# Altium PCB Battery_Charger.PcbDoc
Units mil, origin at the board's own origin, x right, y up, seen from the top; angles counter-clockwise.
Board outline 5000 x 2985 mil, 2 copper layers (Top Layer, Bottom Layer); 48 components, 40 nets, 142 pads, 109 vias.
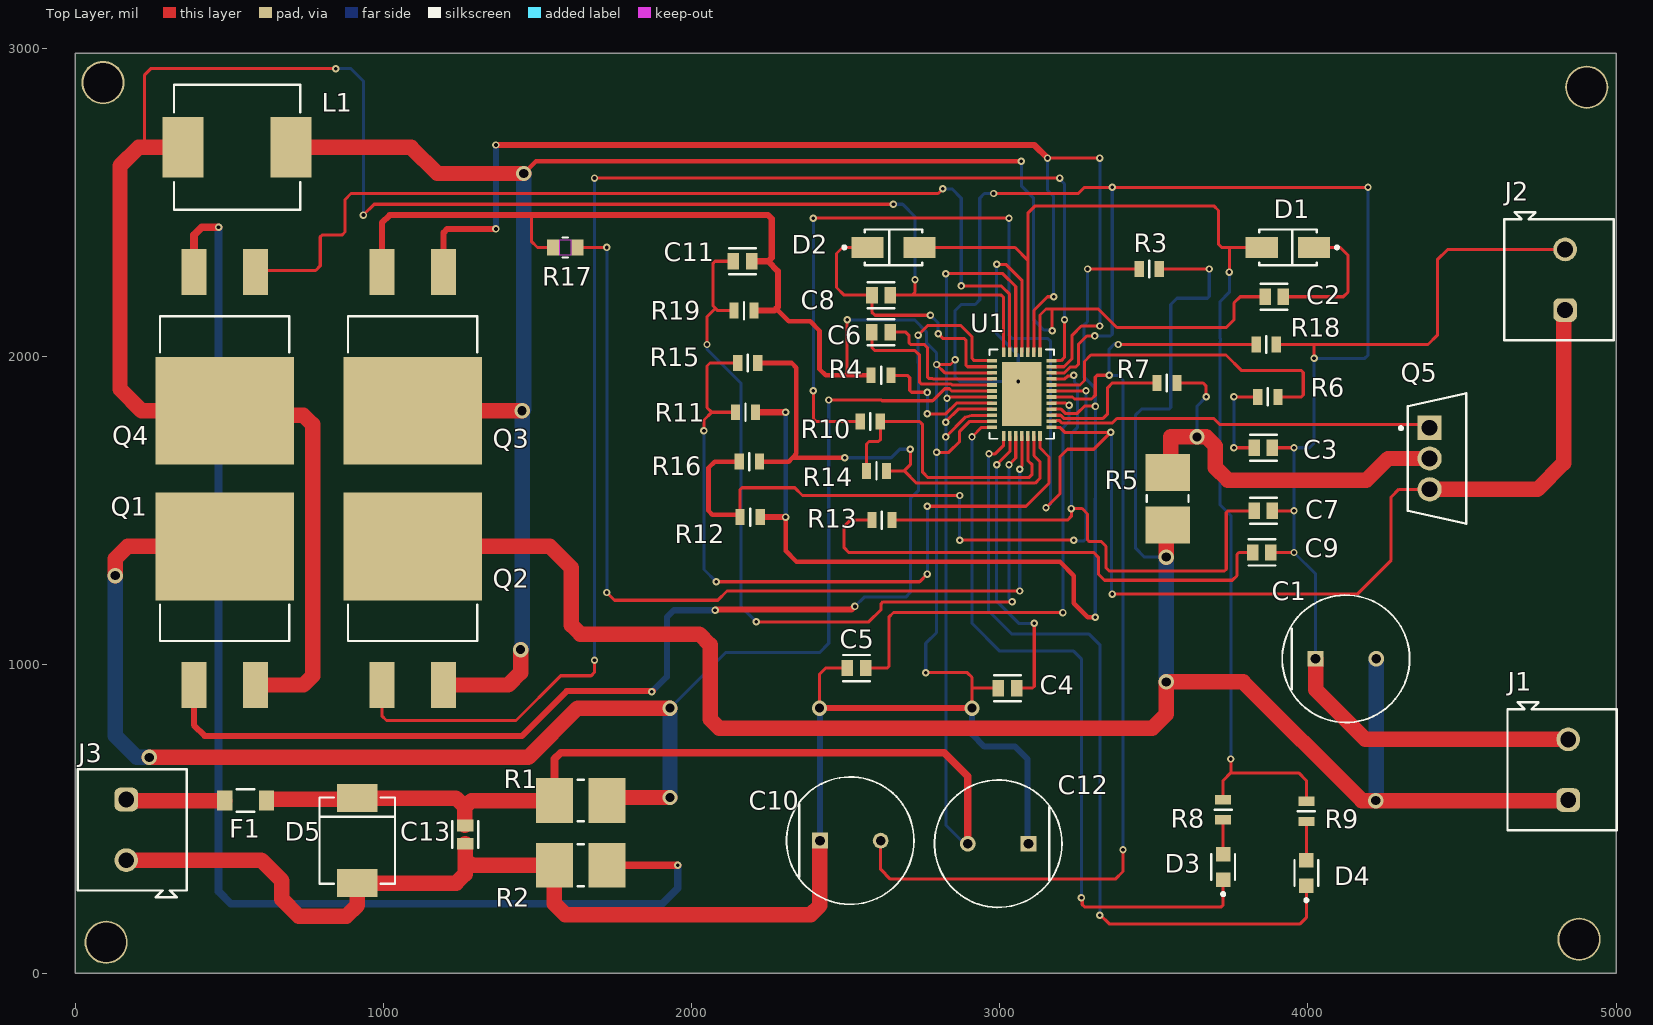
[diagram p0: Top Layer view]
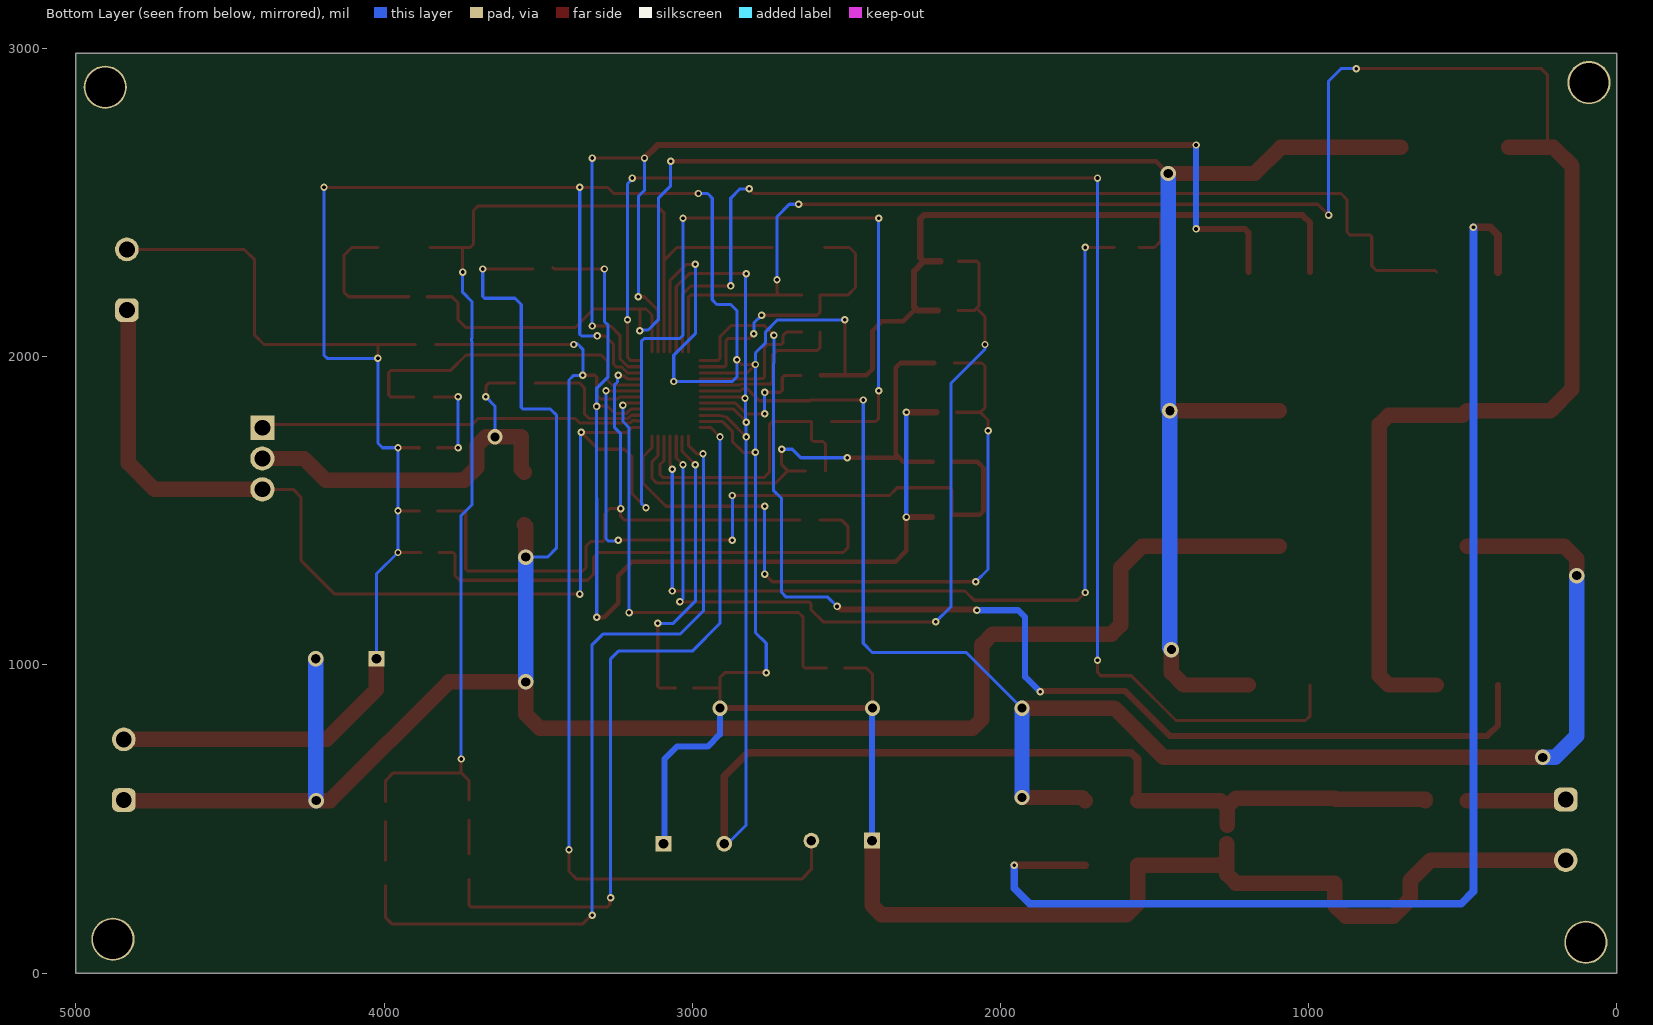
[diagram p1: Bottom Layer view, seen from below]
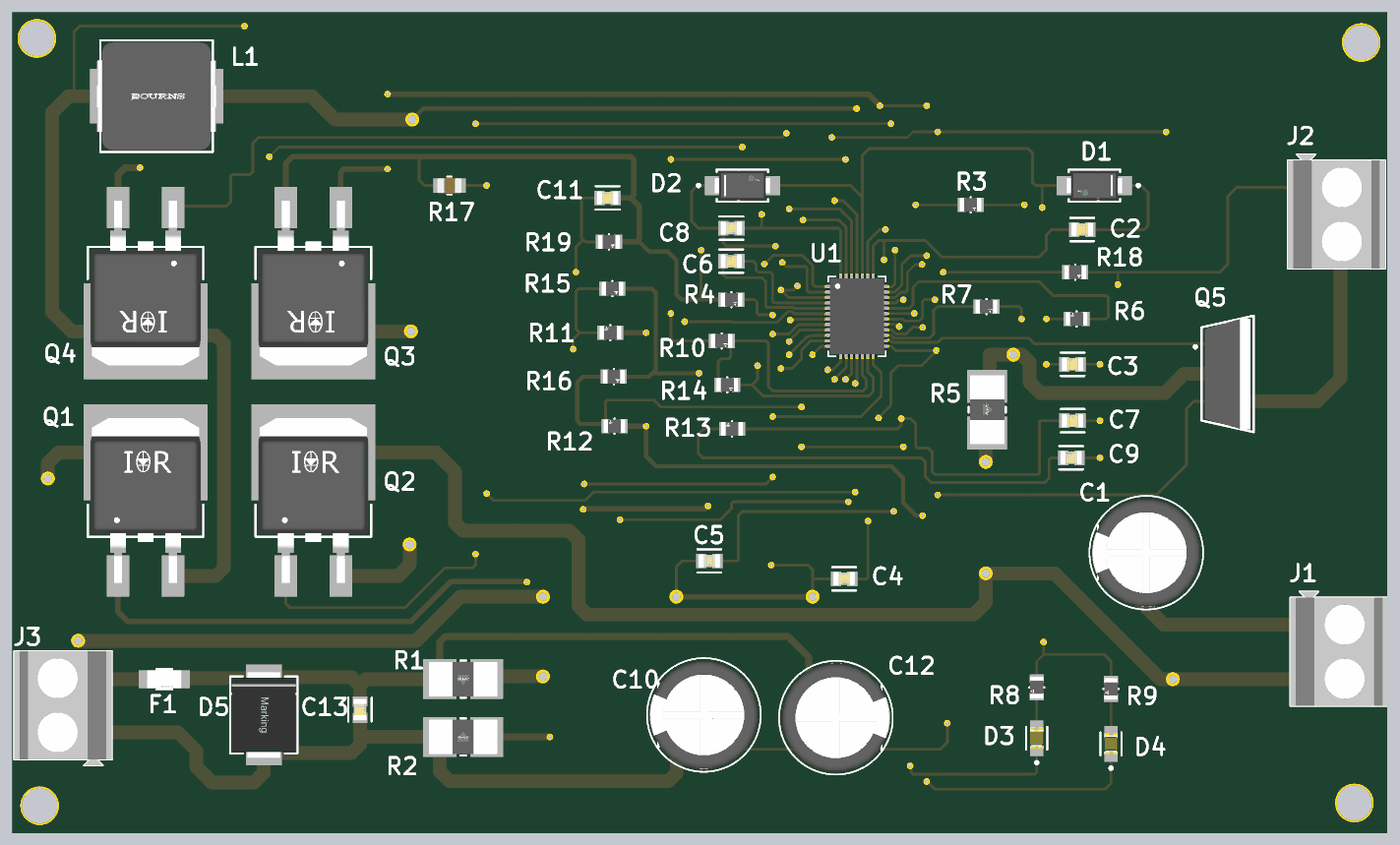
[diagram p2: 3D render of the assembled board from above, using the file's embedded part models]

## Layer stack, top to bottom
Top Solder: solder mask 0.4, Solder Resist, Dk 3.5
Top Layer: signal copper 1.4
Dielectric 1: dielectric 12.6, FR-4, Dk 4.8
Bottom Layer: signal copper 1.4
Bottom Solder: solder mask 0.4, Solder Resist, Dk 3.5

## Board outline
0,0 5000,0 5000,2985 0,2985

## Design rules (kind name [scope] priority, off if disabled: settings)
Clearance [All] p1: gap=10 ignorepadtopadclearanceinfootprint=FALSE except(2: SMDPad-Fill SMDPad-Poly SMDPad-Region; 5: Arc-Arc Arc-Track Arc-SMDPad Track-Track Track-SMDPad SMDPad-SMDPad SMDPad-THPad SMDPad-Via SMDPad-Text SMDPad-Hole; 8: Arc-Fill Arc-Poly Arc-Region Track-Fill Track-Poly Track-Region Fill-Fill Fill-Poly Fill-Region Poly-Poly Poly-Region Region-Region)
HoleSize [All] p1: absolutevalues=TRUE maxlimit=130 minlimit=1 maxpercent=80.000 minpercent=20.000
PolygonConnect [All] p1: connectstyle=Relief reliefconductorwidth=10 reliefentries=4 polygonreliefangle="90 Angle" airgapwidth=10
RoutingVias [All] p1: holewidth=28 width=50 viastyle="Through Hole" minholewidth=10 minwidth=20 maxholewidth=28 maxwidth=50
SolderMaskExpansion [All] p1: expansion=0 istentingtop=FALSE
SupplyNets "Schematic Supply Nets" [InNet('MODE')] p1: voltage=0.000
Width [All] p1: maxlimit=50 minlimit=10 preferedwidth=20 minimp=50.000000 maximp=50.000000 favimp=50.000000
29 further rules are at their usual default settings.

## Classes and differential pairs
component class U_Switching_Bridge: C1 J1 L1 Q1 Q2 Q3 Q4 R1 R2
component class U_LTC4020_Controller: C2 C3 C4 C5 C6 C7 C8 C9 C10 C11 D1 D2 D3 D4 J2 Q5 R3 R4 R5 R6 R7 R8 R9 R10 R11 R12 R13 R14 R15 R16 R17 R18 R19 U1
component class U_Input_Stage: C12 C13 D5 F1 J3

## Components (designator, comment, footprint, x,y, rotation, side; value= is the part's Value field where it differs from the comment)
C1 "1000u" FP-RAD-TH-D_10_0_5-L_25_2-MFG 4123.43,1020 r0 top
C2 "1u" FP-C0805C-DN-MFG 3890.47,2195 r180 top value="0.10 μF"
C3 "10n" FP-C0805C-DN-MFG 3855.47,1705 r0 top value="0.10 μF"
C4 "0.2u" FP-C0805C-DN-MFG 3025,925 r180 top value="0.10 μF"
C5 "100p" FP-C0805C-DN-MFG 2535,990 r180 top value="0.10 μF"
C6 "0.2u" FP-C0805C-DN-MFG 2614.53,2080 r0 top value="0.10 μF"
C7 "68p" FP-C0805C-DN-MFG 3855.47,1500 r0 top value="0.10 μF"
C8 "1u" FP-C0805C-DN-MFG 2615,2200 r180 top value="0.10 μF"
C9 "680p" FP-C0805C-DN-MFG 3850.47,1365 r0 top value="0.10 μF"
C10 "1u" FP-RAD-TH-D_10_0_5-L_16_1-MFG 2515,430 r0 top
C11 "0.1u" FP-C0805C-DN-MFG 2165,2310 r0 top value="0.10 μF"
C12 "10u" FP-RAD-TH-D_10_0_5-L_16_1-MFG 2995,420 r180 top
C13 "0.2u" FP-C0805C-DN-MFG 1265,449.53 r270 top value="0.10 μF"
D1 "SS14" FP-403AE-MFG 3935,2355 r0 top
D2 "SS14" FP-403AE-MFG 2655,2355 r180 top
D3 "APHCM2012CGCK-F01" FP-APHCM2012CGCK-F01-MFG 3725,345 r90 top
D4 "APHCM2012CGCK-F01" FP-APHCM2012CGCK-F01-MFG 3995,325 r90 top
D5 "824540301" WE-TVSP_DO-214AB_Unidirectional 915,430 r270 top
F1 "15A,32VDC" FP-SF-1206HHA-R-MFG 552.91,560 r0 top
J1 "691134710002" 691134710002 4825,660 r90 top
J2 "691134710002" 691134710002 4815,2250 r90 top
J3 "691134710002" 691134710002 185,465 r270 top
L1 "15u" FP-SRP1038WA-MFG 525,2680 r0 top
Q1 "IRF540NSTRLPBF" FP-PG-TO263-3-MFG 485,1210 r0 top
Q2 "IRF540NSTRLPBF" FP-PG-TO263-3-MFG 1095,1210 r0 top
Q3 "IRF540NSTRLPBF" FP-PG-TO263-3-MFG 1095,2000 r180 top
Q4 "IRF540NSTRLPBF" FP-PG-TO263-3-MFG 485,2000 r180 top
Q5 "IRF4905PBF" FP-PG-TO220-3-MFG 4419.02,1670 r0 top
R1 "5 milli ohm" FP-WSLP2512-0R001-0R0049-MFG 1639.96,560 r0 top
R2 "5 milli ohm" FP-WSLP2512-0R001-0R0049-MFG 1639.96,350 r180 top
R3 "100" FP-MCU0805-IPC_C 3485,2285 r0 top
R4 "100k" FP-MCU0805-IPC_C 2615,1940 r0 top
R5 "5 milli ohm" FP-WSLP2512-0R001-0R0049-MFG 3545,1540 r90 top
R6 "56k" FP-MCU0805-IPC_C 3870,1870 r180 top
R7 "100" FP-MCU0805-IPC_C 3542.45,1915 r0 top
R8 "10k" FP-MCU0805-IPC_C 3725,530 r270 top
R9 "10k" FP-MCU0805-IPC_C 3995,525 r270 top
R10 "100k" FP-MCU0805-IPC_C 2580,1790 r0 top
R11 "100k" FP-MCU0805-IPC_C 2175,1820 r180 top
R12 "100k" FP-MCU0805-IPC_C 2190,1480 r180 top
R13 "100" FP-MCU0805-IPC_C 2617.55,1470 r180 top
R14 "10k" FP-MCU0805-IPC_C 2600,1630 r0 top
R15 "10k" FP-MCU0805-IPC_C 2182.45,1980 r0 top
R16 "10k" FP-MCU0805-IPC_C 2187.45,1660 r0 top
R17 "10k, Beeta=3380" NTCS0805_VIS 1590,2355 r0 top
R18 "20k" FP-MCU0805-IPC_C 3865,2040 r0 top
R19 "20k" FP-MCU0805-IPC_C 2170,2150 r0 top
U1 "LTC4020IUHF#PBF" QFN-38_UHF 3071.55,1879.21 r0 top

## Footprints (in the part's own frame and the unit in brackets; to place one, negate y for a bottom-side part, rotate by r counter-clockwise, add the part's x,y. Pads: shape width x height; smd on the part's side, far side on the other; paste and mask are expansions set on the pad)
691134710002 [mm] "Serie 1347 - 5.00 mm_2 pins"
  rrect50% 1.95x1.95 hole 1.3: 1(-2.5,-0.5)
  round 1.95 hole 1.3: 2(2.5,-0.5)
  silkscreen extent -5,-4.5 5.55,4.5, body extent -5,-4.5 5.55,4.5, height 13.1
FP-403AE-MFG [mm]
  rect 2.65x1.75 smd paste+0 mask+0: 1(-2.15,0) 2(2.15,0)
  silkscreen extent -2.37,-1.48 4.18,1.48, body extent -3.57,-1.58 3.57,1.58, height 0.25
FP-APHCM2012CGCK-F01-MFG [mm]
  rect 1.2x1.2 smd paste+0 mask+0: 1(-1.05,0) 2(1.05,0)
  silkscreen extent -2.37,-0.97 1.05,0.97, body extent -1.75,-0.77 1.75,0.77, height 0.25
FP-C0805C-DN-MFG [mm]
  rect 0.95x1.35 smd paste+0 mask+0: 1(-0.75,0) 2(0.75,0)
  silkscreen extent -1.1,-1.07 1.1,1.07, body extent -1.4,-0.85 1.4,0.85, height 0.25
FP-MCU0805-IPC_C [mil]
  rect 29.87x51.5 smd paste+0 mask+0: 1(-32.55,0) 2(32.55,0)
  silkscreen extent 0,-28 0,28, body extent -51,-31 51,31, height 10
FP-PG-TO220-3-MFG [mm]
  rect 2x2 hole 1.3 paste-2539.97 mask+0: 1(-0.61,2.54)
  round 2 hole 1.3 paste-2539.97 mask+0: 2(-0.61,0) 3(-0.61,-2.54)
  silkscreen extent -3.1,-5.38 2.41,5.38, body extent -2.51,-5.48 2.51,5.48, height 0.25
FP-PG-TO263-3-MFG [mm]
  rect 2.08x3.81 smd paste+0 mask+0: 1(-2.54,-6.985) 3(2.54,-6.985)
  rect 11.43x8.89 smd paste+0 mask+0: 4(0,4.445)
  silkscreen extent -5.34,-3.36 5.34,-0.38, body extent -5.81,-8.99 5.81,8.99, height 0.25
FP-RAD-TH-D_10_0_5-L_16_1-MFG [mm]
  rect 1.3x1.3 hole 0.8 paste-2539.97 mask+0: 1(-2.5,0)
  round 1.3 hole 0.8 paste-2539.97 mask+0: 2(2.5,0)
  silkscreen extent -5.25,-5.25 5.25,5.25, body extent -5.35,-5.35 5.35,5.35, height 0.25
FP-RAD-TH-D_10_0_5-L_25_2-MFG [mm]
  rect 1.3x1.3 hole 0.8 paste-2539.97 mask+0: 1(-2.5,0)
  round 1.3 hole 0.8 paste-2539.97 mask+0: 2(2.5,0)
  silkscreen extent -5.25,-5.25 5.25,5.25, body extent -5.35,-5.35 5.35,5.35, height 0.25
FP-SF-1206HHA-R-MFG [mm]
  rect 1.25x1.65 smd paste+0 mask+0: 1(-1.725,0) 2(1.725,0)
  silkscreen extent -0.72,-0.92 0.72,0.92, body extent -2.45,-1.02 2.45,1.02, height 0.25
FP-SRP1038WA-MFG [mm]
  rect 3.4x5 smd paste+0 mask+0: 1(-4.45,0) 2(4.45,0)
  silkscreen extent -5.2,-5.15 5.2,5.15, body extent -6.25,-5.25 6.25,5.25, height 0.25
FP-WSLP2512-0R001-0R0049-MFG [mm]
  rect 3.05x3.68 smd paste+0 mask+0: 1(-2.16,0) 2(2.16,0)
  silkscreen extent -0.26,-1.72 0.26,1.72, body extent -3.78,-1.94 3.78,1.94, height 0.25
NTCS0805_VIS [mm]
  rect 1x1.3 smd paste+0 mask+0: 1(-1,0) 2(1,0)
  Top Layer keep-out region: -0.449,-0.648 -0.449,0.648 0.449,0.648 0.449,-0.648
  silkscreen extent -0.22,-0.83 0.22,0.83, body extent -1.1,-0.7 1.1,0.7, height 0.94
QFN-38_UHF [mm]
  rect 0.805x0.3 smd paste+0 mask+0.102: 1(-2.452,2.75) 2(-2.452,2.25) 3(-2.452,1.75) 4(-2.452,1.25) 5(-2.452,0.75) 6(-2.452,0.25) 7(-2.452,-0.25) 8(-2.452,-0.75) 9(-2.452,-1.25) 10(-2.452,-1.75) 11(-2.452,-2.25) 12(-2.452,-2.75) 20(2.452,-2.75) 21(2.452,-2.25) 22(2.452,-1.75) 23(2.452,-1.25) 24(2.452,-0.75) 25(2.452,-0.25) 26(2.452,0.25) 27(2.452,0.75) 28(2.452,1.25) 29(2.452,1.75) 30(2.452,2.25) 31(2.452,2.75)
  rect 0.3x0.805 smd paste+0 mask+0.102: 13(-1.5,-3.452) 14(-1,-3.452) 15(-0.5,-3.452) 16(0,-3.452) 17(0.5,-3.452) 18(1,-3.452) 19(1.5,-3.452) 32(1.5,3.452) 33(1,3.452) 34(0.5,3.452) 35(0,3.452) 36(-0.5,3.452) 37(-1,3.452) 38(-1.5,3.452)
  rect 3.25x5.25 smd paste-4 mask+0.102: 39(0,0)
  silkscreen extent -2.67,-3.68 2.67,3.68, body extent -2.5,-3.5 2.5,3.5, height 0.8
WE-TVSP_DO-214AB_Unidirectional [mm] "Power TVS Diode, 2-Leads. body 6.86x5.9mm"
  rect 2.3x3.3 smd: 1(-3.5,0) 2(3.5,0)
  silkscreen extent -3.55,-3.11 3.56,3.11, body extent -3.97,-2.95 3.97,2.95, height 2.48

## Part data
C1: library part CMP-05427-001179-1, "Aluminum Electrolytic Capacitors (Radial Lead Type) 1000uF ±20% 35V", Capacitance=1mF, Case/Package=Radial, ESR (Equivalent Series Resistance)=18mR, Max Operating Temperature=105°C, Min Operating Temperature=-40°C, Package Quantity=200, Ripple Current=2.47A, Tolerance=20%, Voltage=25V, Construction=RADIAL, Contact Plating=Tin, Diameter=10mm, Height=25mm, Height - Seated (Max)=1.063inch, Impedance=18mR, Lead Diameter=0.6mm, Lead Pitch=5mm, Lead/Base Style=Straight, Length=25mm, Life (Hours)=10000Hour, Mount="Through Hole", Packaging=Bulk, Polarity=Polar, Radiation Hardening=No, REACH SVHC="No SVHC", RoHS Compliant=Yes, Series=FR, Termination=Radial, Voltage Rating=25V, Voltage Rating (DC)=25V
C2 C3 C4 C5 C6 C7 C8 C9 C11 C13: library part CMP-2007-00279-2, "CAP CER 0.1UF 50V X7R 0805", Capacitance="0.10 μF", Manufacturer=KEMET, Manufacturer Part Number=C0805C104K5RACTU, Package=C0805C-DN, Temperature="-55°C to +125°C", Temperature Characteristic=X7R, Temperature Coefficient=30ppm/°C, Temperature Range High=+125°C, Temperature Range Low=-55°C, Tolerance=0.1, Voltage Rating="50 V", Automotive=No, Category=Cap, ComponentLink2Description=Datasheet, ComponentLink2URL=https://content.kemet.com/datasheets/KEM_C1003_C0G_SMD.pdf, Device Class L1="Passive Components", Device Class L2=Capacitors, Device Class L3="Ceramic Capacitors", Digikey Description="CAP CER 0.1UF 50V X7R 0805", Height=0.88mm, Ipc Land Pattern Name=CAPC200125X78, Lead Free=Yes, Material=Ceramic, Mouser Description="Cap Ceramic 0.1uF 50V X7R 10% SMD 2.0 x 1.2 mm 125 C Paper T/R", Octopart=https://octopart.com/c0805c104k5ractu-kemet-143926, RoHS=TRUE
C10 C12: library part CMP-05427-000510-1, "Aluminum Electrolytic Capacitors (Radial Lead Type) AEC-Q200 Qualified 820uF ±20% 10V", Capacitance=820uF, Case/Package=Radial, Dielectric Material=Aluminium, ESR (Equivalent Series Resistance)=68mR, Leakage Current=3uA, Max Operating Temperature=105°C, Min Operating Temperature=-55°C, Package Quantity=200, Ripple Current=1.05A, Tolerance=20%, Voltage=10V, Construction=RADIAL, Diameter=10mm, Height=16mm, Height - Seated (Max)=0.63inch, Impedance=68mR, Lead Diameter=0.6mm, Lead Free="Lead Free", Lead Pitch=5mm, Length=16mm, Life (Hours)=3000Hour, Mount="Through Hole", Number of Pins=2, Packaging=Bulk, Radiation Hardening=No, REACH SVHC="No SVHC", Ripple Current (AC)=1.05A, RoHS Compliant=Yes, Series=FC, Termination=Radial, Voltage Rating=10V, Voltage Rating (DC)=10V
D1 D2: library part CMP-2000-04943-2, "DIODE SCHOTTKY 40V 1A SMA", Forward Current=1A, Manufacturer="ON Semiconductor", Max Junction Temp=+125°C, Max Repetitive Reverse Voltage=40V, Max Surge Forward Current=40A, Package=403AE, Peak Reverse Current=0.2mA, Temperature="-65°C to +125°C", Temperature Range Low=-65°C, Automotive=No, Category=Diode, ComponentLink2Description=Datasheet, ComponentLink2URL=https://www.onsemi.com/pub/Collateral/SS19-D.PDF, Device Class L1="Discrete Semiconductors", Device Class L2=Diodes, Device Class L3="Schottky Diodes", Digikey Description="DIODE SCHOTTKY 40V 1A SMA", Height=2.5mm, Lead Free=Yes, Manufacturer Part Number=SS14, Mouser Description="Schottky Diodes & Rectifiers SMA 40V 1.0A", Octopart=https://octopart.com/ss14-on+semiconductor-29205033, RoHS=TRUE, Standoff Height=0.05mm, Temperature Range High=+125°C
D3: library part CMP-44529-000062-1, "LED GREEN CLEAR CHIP SMD", Case Code (Imperial)=0805, Case Code (Metric)=2012, Color=Green, Forward Current=20mA, Forward Voltage=2.1V, Lens Color=Clear, Max Operating Temperature=85°C, Min Operating Temperature=-40°C, Package Quantity=1, Case/Package=0805, Dominant Wavelength=570nm, Height=0.4mm, Illumination Color=Green, Lead Free="Lead Free", Length=2mm, Lens Style=Clear, Luminous Intensity=40mcd, Mount="Surface Mount", Number of LEDs=1, Number of Pins=2, Packaging="Tape and Reel", RoHS Compliant=Yes, Series=APHCM, Test Current=20mA, Viewing Angle=110°, Wavelength=570nm, Width=1.25mm
D4: library part CMP-44529-000062-1, "LED RED CLEAR CHIP SMD", Case Code (Imperial)=0805, Case Code (Metric)=2012, Color=Green, Forward Current=20mA, Forward Voltage=2.1V, Lens Color=Clear, Max Operating Temperature=85°C, Min Operating Temperature=-40°C, Package Quantity=1, Case/Package=0805, Dominant Wavelength=570nm, Height=0.4mm, Illumination Color=Green, Lead Free="Lead Free", Length=2mm, Lens Style=Clear, Luminous Intensity=40mcd, Mount="Surface Mount", Number of LEDs=1, Number of Pins=2, Packaging="Tape and Reel", RoHS Compliant=Yes, Series=APHCM, Test Current=20mA, Viewing Angle=110°, Wavelength=570nm, Width=1.25mm
D5: library part CMP-03913-71101661-2, "Tvs Diode, 1.5KW, 30V, Unidir, DO-214AB", Breakdown Voltage=35.05V, Clamping Voltage=48.4V, Leakage Current=1µA, Max Operating Temperature=150°C, Min Operating Temperature=-65°C, Peak Pulse Current=31A, Peak Pulse Power=1.5kW, Power Line Protection=No, Reverse Standoff Voltage=30V, Composition=Zener, Height=2.5mm, Length=6.86mm, Max Breakdown Voltage=35.05V, Min Breakdown Voltage=35.05V, Mount="Surface Mount", Number of Pins=2, Number of Unidirectional Channels=1, Packaging="Cut Tape", Polarity=Unidirectional, REACH SVHC=Unknown, RoHS=Compliant, Width=5.91mm
F1: library part CMP-00059-142019744-1, "SF-1206HHA1500R-2 Fuse Chip 15A 50V SMD Solder Pad 1206 3.2 X 1.65 X 1mm", Case/Package=1206, Fuse Current=15A, Max Operating Temperature=125°C, Min Operating Temperature=-55°C, Resistance=2.6mΩ, Voltage Rating=50V, Height=1.2mm, NexarPartId=142019744
J1 J2 J3: library part CMP-1502-03295-3, "Wire-To-Board Terminal Block, 5mm Pitch, Horizontal, Screw, 2 Poles"
L1: library part CMP-07248-000131-1, "IND,11X10X3.8MM,3.3UH20%,15A,SHD"
Q1 Q2 Q3 Q4: library part CMP-00196-65873407-1, "IRF540NSTRLPBF Transistor MOSFET N Channel 100 Volt 33 Amp 3-Pin 2+ Tab D2pak Tape And Reel", Case/Package=D2PAK, Continuous Drain Current (ID)=33A, Drain to Source Breakdown Voltage=100V, Drain to Source Resistance=44mΩ, Gate to Source Voltage (Vgs)=20V, Input Capacitance=1.96nF, Max Junction Temperature (Tj)=175°C, Max Power Dissipation=3.8W, Min Operating Temperature=-55°C, Package Quantity=800, Resistance=44MΩ, Threshold Voltage=4V, Contact Plating=Tin, Current Rating=33A, Drain to Source Voltage (Vdss)=100V, Dual Supply Voltage=100V, Element Configuration=Single, Fall Time=35ns, Height=4.826mm, Lead Free="Lead Free", Length=10.668mm, Lifecycle Status=NRND, Max Operating Temperature=175°C, Mount="Surface Mount", NexarPartId=65873407, Nominal Vgs=4V, Number of Channels=1, Number of Elements=1, Number of Pins=3, On-State Resistance=44mΩ, Packaging=Bulk, Power Dissipation=3.8W, Radiation Hardening=No, Rds On Max=8.4mΩ, REACH SVHC="No SVHC", Recovery Time=170ns, Rise Time=35ns, RoHS=Compliant, Schedule B="8541290080, 8541290080", Termination=SMD/SMT, Turn-Off Delay Time=39ns, Turn-On Delay Time=11ns, Voltage Rating (DC)=100V, Width=9.65mm
Q5: library part CMP-32901-000200-1, "MOSFET P-CH 55V 74A TO-220AB", Case/Package=TO-220, Continuous Drain Current (ID)=74A, Drain to Source Breakdown Voltage=-55V, Drain to Source Resistance=20mR, Gate to Source Voltage (Vgs)=20V, Input Capacitance=3.4nF, Max Operating Temperature=175°C, Max Power Dissipation=200W, Min Operating Temperature=-55°C, Threshold Voltage=-4V, Drain to Source Voltage (Vdss)=-55V, Element Configuration=Single, Halogen Free="Halogen Free", Height=0.6inch, Lead Free="Lead Free", Length=0.414inch, Max Dual Supply Voltage=-55V, Mount="Through Hole", Number of Pins=3, Packaging=Rail/Tube, Power Dissipation=200W, Rds On Max=20mR, REACH SVHC="No SVHC", RoHS Compliant=Yes, Turn-Off Delay Time=61ns, Turn-On Delay Time=18ns, Width=0.185inch
R1 R2 R5: library part CMP-00030-58203087-1, "WSLP25122L500FEA SMD Chip Resistor, 5 milli ohm Ohm, ± 1%, 3 W, 2512 [6332 Metric], Metal Strip, Power", NexarPartId=58203087, RoHS=Non-Compliant
R3 R4 R6 R7 R8 R9 R10 R11 R12 R13 R14 R15 R16 R18 R19: library part CMP-02407-001247-1, "RES 1.05K OHM 0.5% 1/5W 0805"
R17: library part CMP-00030-44434792-1, "NTCS0805E3153FMT Thermistor NTC 15K Ohm 1% 2-Pin 0805 Surface Mount Solder Pad 3700K -4.5 to -4 T/R Automotive", Case Code (Imperial)=0805, Case Code (Metric)=2012, Max Operating Temperature=150°C, Max Power Dissipation=210mW, Min Operating Temperature=-40°C, Resistance=15kΩ, Tolerance=1%, Accuracy=1%, Case/Package=0805, Depth=1.25mm, Lead Free="Contains Lead", Length=2mm, Mount="Surface Mount", NexarPartId=44434792, Number of Pins=2, Packaging=Digi-Reel®, Power Rating=210mW, Radiation Hardening=No, RoHS=Compliant, Schedule B="8533400080, 8533400080", Termination=SMD/SMT
U1: "55V Buck-Boost Multi-Chemistry Battery Charger", Package="QFN-38 Linear Technology", Check_prices=https://www.snapeda.com/parts/LTC4020IUHF%23PBF/Analog+Devices/view-part/?ref=eda, MF="Analog Devices", MP=LTC4020IUHF#PBF, SnapEDA_Link=https://www.snapeda.com/parts/LTC4020IUHF%23PBF/Analog+Devices/view-part/?ref=snap

## Free pads (board coordinates)
  round 140 hole 128 unplated: 6(90,2890) 6(100,100) 6(4880,110) 6(4905,2875)

## Via types
v1: diameter 24, hole 12, Top Layer to Bottom Layer, 96 vias
v2: diameter 50, hole 30, Top Layer to Bottom Layer, 13 vias

## Nets (pads, with @x,y where several pads share a name; then routed paths per layer and width w, separated by ;. In a path a pad name is that pad's centre, name@x,y a point inside that pad or via, vN(x,y) a via of type N, cw(c..) or ccw(c..) an arc to the next point about the centre after c; other vN are vias at no path point)
BAT: J2.1 Q5.3 R10.1 U1.20 | length 5878.9
  Top Layer w10: v1(2395,1890) 2395,1800 2405,1790 R10.1 ; v1(2395,2450) v1(3030,2450) ; v1(3150,1510) 3195,1555 3195,1675 3220,1700 3305.5,1700 v1(3360.5,1755) 3210.55,1755 3194.6,1770.94 U1.20 ; v1(3365,1230) 4160,1230 4270,1340 4270,1545 4295,1570 Q5.3
  Top Layer w50: Q5.3 4745,1570 4830,1655 4830,2146.89 J2.1
  Bottom Layer w10: v1(2395,1890) v1(2395,2450) ; v1(3030,2450) 3030,2070 3040,2060 3155,2060 3165,2050 3165,1525 v1(3150,1510) ; v1(3360.5,1755) 3362.75,1752.75 3362.75,1232.25 v1(3365,1230)
BG1_in: Q4.1 U1.37 | length 3172
  Top Layer w10: Q4.1 590,2280 780,2280 795,2295 795,2389.14 800.86,2395 865,2395 875,2405 875,2510 895,2530 2800,2530 v1(2815,2545) ; v1(2875,2230) 3005,2230 3032.18,2202.82 U1.37
  Bottom Layer w10: v1(2815,2545) 2845,2545 2875,2515 v1(2875,2230)
BG2_in: Q3.1 U1.30 U1.33 | length 4030.4
  Top Layer w10: U1.33 3110.92,2150.92 3155,2195 v1(3175,2195) ; v1(3155,2645) v1(3325,2645) ; U1.30 3208.4,1967.8 3235,1994.4 3235,2070 3265,2100 v1(3325,2100)
  Top Layer w20: Q3.1 1195,2403.28 1206.72,2415 v1(1365,2415) ; v1(1365,2687.37) 3112.63,2687.37 v1(3155,2645)
  Bottom Layer w10: v1(3155,2645) 3155,2540 3175,2520 v1(3175,2195) ; v1(3325,2100) v1(3325,2645)
  Bottom Layer w20: v1(1365,2415) v1(1365,2687.37)
BGATE: Q5.1 U1.21 | length 1250.1
  Top Layer w10: U1.21 3169.01,1791.54 3182.67,1791.54 3184.8,1793.67 3193.09,1793.67 3201.39,1785.37 3365.37,1785.37 3380,1800 3695,1800 3715,1780 4385,1780 Q5.1
BST1: C8.2 D2.2 U1.2 | length 930
  Top Layer w10: D2.2 2490,2355 2470,2335 2470,2225 2495,2200 C8.2 ; C8.2@2585,2199.53 2585,2145 2595,2135 v1(2775,2135) ; v1(2800,2075) 2815,2060 2884.14,2060 2890,2054.14 2890,1973.65 2895.86,1967.8 U1.2
  Bottom Layer w10: v1(2775,2135) 2800,2110 v1(2800,2075)
BST2: C2.1 D1.2 | length 456.9
  Top Layer w10: C2.1 4115,2195 4130,2210 4130,2330 4105,2355 D1.2
CSN: R7.1 U1.22 | length 443.2
  Top Layer w10: U1.22 3197.66,1810.32 3207.6,1800.37 3335.37,1800.37 3350,1815 3350,1900 3365,1915 R7.1
CSP: R3.1 R11.1 R12.1 U1.23 | length 3255.9
  Top Layer w10: U1.23 3199.19,1830 3213.82,1815.37 3250.37,1815.37 3275,1840 3309.55,1840 v1(3310.49,1839.06) ; v1(3285,2285) 3447.45,2285 R3.1@3452.45,2290
  Top Layer w15: v1(2305,1480) 2305,1370 2340.5,1334.5 3195.5,1334.5 3240,1290 3240,1200 3285,1155 v1(3310,1155)
  Top Layer w20: R11.1 v1(2305,1820) ; R12.1 v1(2305,1480)
  Bottom Layer w10: v1(3285,2285) 3285,2114.2 3273,2102.2 3273,1935.18 3310,1898.18 3310,1839.55 v1(3310.49,1839.06) 3310.24,1838.82 3310.24,1540.24 3310,1540 v1(3310,1155)
  Bottom Layer w15: v1(2305,1480) v1(2305,1820)
FBG: R14.2 R15.2 R16.2 U1.18 | length 1680.2
  Top Layer w10: R14.2 2690,1630 ; v1(2710,1700) 2710,1650 2690,1630 ; U1.18 3110.92,1679.08 3130,1660 3130,1605 3115,1590 2730,1590 2690,1630
  Top Layer w15: R15.2 2325,1980 2340,1965 2340,1685 2327.5,1672.5 ; R16.2 2315,1660 2327.5,1672.5 ; v1(2497.5,1672.5) 2327.5,1672.5
  Bottom Layer w10: v1(2497.5,1672.5) 2647.5,1672.5 2675,1700 v1(2710,1700)
ILIMIT: C10.2 R18.1 U1.25 | length 3377.7
  Top Layer w10: C10.2 2613.43,336.57 2645,305 3375,305 3400,330 v1(3400,400) ; U1.25 3236.18,1869.37 3242.55,1863 3298,1863 3310,1875 3310,1934.14 3315.93,1940.07 v1(3354.97,1940.07) ; v1(3385,2040) R18.1
  Bottom Layer w10: v1@3387.32,2042.32 3372.32,2042.32 3355,2025 v1(3354.97,1940.07) 3355.07,1940 3385,1940 3400,1925 v1(3400,400)
INTVCC: D1.1 D2.1 R8.1 R9.1 U1.34 | length 3862.3
  Top Layer w10: D2.1 3050,2355 3091.24,2313.76 ; U1.34 3091.24,2313.76 ; R8.1 3725,625 3750,650 ; v1(3745,2275) 3745,2355 ; v1(3750,695) 3750,650 ; D1.1 3745,2355 ; R9.1 3995,625 3970,650 3750,650 ; 3091.24,2313.76 3091.24,2466.24 3115,2490 3695,2490 3710,2475 3710,2365 3720,2355 3745,2355
  Bottom Layer w10: v1(3745,2275) 3745,2209.14 3715,2179.14 3715,2060 3715.86,2059.14 3715.86,2050.86 3715,2050 3715,1520 3750,1485 v1(3750,695)
MODE: C1.1 C3.2 C4.2 C5.2 C7.2 C9.2 C10.1 C11.2 C12.1 C13.2 D5.2 J1.2 J2.2 J3.2 Q3.3 R2.2 R4.1 R17.1 R18.2 R19.2 U1.3 U1.11 U1.29 U1.35 U1.39 | length 17459.5
  Top Layer w10: 1480,2460 1480,2375 1500,2355 R17.1 ; 1510,2460 1510,2465 ; v2(2415,860) 2415,970 2435,990 C5.2 ; 2505,1940 v1(2505,2120) ; v1(2760,975) 2895,975 2910,960 2910,925 ; v1(2795,1690) 2835,1690 2870,1725 2870,1758.18 2902.45,1790.63 U1.11 ; v1(2855,1990) 2840,1975 v1(2795,1975) 2821.89,1948.11 U1.3 ; v2(2910,860) 2910,925 ; v1(2980,2530) 3255,2530 3275,2550 v1(3365,2550) v1(4195,2550) ; v1(2990,2300) 3020,2300 3071.55,2248.45 U1.35 ; C4.2 2910,925 ; U1.29 3209.93,1948.11 3228.82,1967 3247,1967 3255,1975 3255,2040 3282.79,2067.79 v1(3308,2067.79) ; C9.2 v1(3955,1365) ; C7.2 v1(3955,1500) ; C3.2 v1(3955,1705) ; R18.2 4020,2040 ; v1(4020,1995) 4020,2040 ; J2.2 4453.43,2348.43 4420,2315 4420,2070 4390,2040 4020,2040
  Top Layer w15: 2274.14,2155.86 2315,2115 2385,2115 2415,2085 2415,1960 2435,1940 2505,1940 R4.1
  Top Layer w20: Q3.3 995,2435 1020,2460 1480,2460 1510,2460 2248.28,2460 2260,2448.28 2260,2321.72 2248.28,2310 ; C11.2 2248.28,2310 ; R19.2 2268.28,2150 2274.14,2155.86 2280,2161.72 2280,2278.28 2248.28,2310 ; v2(2415,860) v2(2910,860)
  Top Layer w50: J3.2 603.43,366.57 670,300 670,240 725,185 880,185 915,220 D5.2 1235.71,292.2 1265,321.49 1265,370 ; C13.2 1265,370 ; C10.1 2415.98,429.41 2415.98,219.29 2386.69,190 1590,190 1554.92,225.08 R2.2 1285,350 1265,370 ; C1.1 4025,920 4186.57,758.43 J1.2
  Bottom Layer w10: v1(2505,2120) 2723.18,2120 2762,2081.18 2762,2045.89 2795,2012.89 v1(2795,1975) v1(2795,1690) 2795,1105 2760,1070 v1(2760,975) ; v1(2980,2530) 2950,2530 2935,2515 2935,2185 2920,2170 2875,2170 2855,2150 v1(2855,1990) 2855,1935 2870,1920 v1(3060,1920) 3060,2005 2990,2075 v1(2990,2300) ; v1(3308,2067.79) 3359.14,2067.79 3365,2073.65 v1(3365,2550) ; C1.1 4025,1295 v1(3955,1365) v1(3955,1500) v1(3955,1705) 4005,1705 4020,1720 v1(4020,1995) 4185,1995 4195,2005 v1(4195,2550)
  Bottom Layer w20: v2(2415,860) 2416.57,858.43 C10.1 ; v2(2910,860) 2910,775 2950,735 3050,735 3090,695 3090,423.43 C12.1
NetC3_1: C3.1 R6.2 | length 308.4
  Top Layer w10: v1(3760,1705) C3.1 ; v1(3760,1870) R6.2
  Bottom Layer w10: v1(3760,1705) v1(3760,1870)
NetC4_1: C4.1 U1.14 | length 967.8
  Top Layer w10: v1(2990,1650) 3007.54,1667.54 3032.82,1692.82 U1.14@3032.82,1740.84 ; C4.1 3106.14,925 3112,930.86 v1(3112,1135)
  Bottom Layer w10: v1(2990,1650) 2990,1206.35 3061.35,1135 v1(3112,1135)
NetC5_1: C5.1 U1.24 | length 1549.6
  Top Layer w10: C5.1 2635.18,990 2640,994.82 2640,1155 2655,1170 v1(3205,1170) ; U1.24 3168.26,1849.84 3213.74,1849.84 3221.21,1842.37 v1(3225,1842.37)
  Bottom Layer w10: v1(3205,1170) 3205,1770 3225,1790 v1(3225,1842.37)
NetC9_1: C9.1 R13.2 | length 1647.7
  Top Layer w10: R13.2 2515,1470 2495,1450 2495,1380 2510,1365 3305,1365 3320,1350 3320,1295 3340,1275 3755,1275 3770,1290 3770,1359.14 3775.86,1365 C9.1
NetD3_2: D3.2 R8.2 | length 111.1
  Top Layer w10: D3.2 R8.2
NetD4_2: D4.2 R9.2 | length 126.1
  Top Layer w10: D4.2 R9.2
NetF1_1: F1.1 J3.1 | length 321.1
  Top Layer w15: J3.1 J3.1@168.74,560
  Top Layer w50: J3.1@168.74,560 F1.1
NetQ4_3: Q4.3 R2.1 | length 4197.6
  Top Layer w25: Q4.3 385,2395 410,2420 v1(465,2420) ; R2.1 v1(1955,350)
  Bottom Layer w25: v1(465,2420) 465,265 505,225 1905,225 1955,275 v1(1955,350)
NetQ5_2: Q5.2 R5.2 R7.2 | length 1364.5
  Top Layer w10: R7.2 3660,1915 3670,1905 v1(3670,1870)
  Top Layer w50: R5.2 3554.29,1634.33 3554.29,1740 v2(3640,1740) 3670.71,1740 3700,1710.71 3700,1640 3740,1600 4190,1600 4260,1670 Q5.2
  Bottom Layer w10: v2(3640,1740) 3640,1840 v1(3670,1870)
NetR6_1: R6.1 U1.27 | length 1075
  Top Layer w10: U1.27 3260.56,1908.74 3275,1923.18 3275,1985 3295.86,2005.86 3734.14,2005.86 3785,1955 3979.14,1955 3985,1949.14 3985,1875.86 3979.14,1870 R6.1
NTC: R17.2 U1.16 | length 3084.4
  Top Layer w10: R17.2 v1(1725,2355) ; v1(1725,1235) 1750,1210 2085,1210 2115,1240 v1(3065,1240) ; v1(3065,1635) 3065,1638.79 3071.55,1645.34 U1.16
  Bottom Layer w10: v1(1725,1235) v1(1725,2355) ; v1(3065,1240) v1(3065,1635)
RNG: C11.1 R19.1 U1.15 | length 2795.5
  Top Layer w10: v1(2050,2040) 2050,2130 2077.5,2157.5 ; C11.1 2075.86,2310 2070,2304.14 2070,2165 2077.5,2157.5 ; R19.1 2085,2150 2077.5,2157.5 ; v1(2210,1140) 2575,1140 2615,1180 2615,1199.14 2620.86,1205 v1(3040,1205) ; v1(3030,1650) 3051.87,1671.87 U1.15
  Bottom Layer w10: v1(2050,2040) 2050,2025 2160,1915 2160,1190 v1(2210,1140) ; v1(3030,1650) 3030,1215 v1(3040,1205)
RT: R4.2 U1.8 | length 458.3
  Top Layer w10: R4.2 2700,1940 2708,1932 2708,1890.86 2713.86,1885 2764.37,1885 v1(2765,1884.37) ; v1(2765,1815) 2825,1815 2859.68,1849.68 U1.8
  Bottom Layer w10: v1(2765,1815) v1(2765,1884.37)
SEN_STOP: Q1.4 R1.2 U1.6 | length 5283.2
  Top Layer w10: v1(2445,1860) 2615.6,1860 2618.23,1857.37 2782.37,1857.37 2821.37,1896.37 2836.18,1896.37 2843.5,1889.06 U1.6
  Top Layer w50: v2(130,1290) 130,1345 170,1385 Q1.4 ; v2(240,700) 1470,700 1630,860 v2(1930,860) ; R1.2 1735,570 v2(1930,570)
  Bottom Layer w10: v2(1930,860) 2110,1040 2415,1040 2445,1070 v1(2445,1860)
  Bottom Layer w50: v2(130,1290) 130,770 200,700 v2(240,700) ; v2(1930,570) v2(1930,860)
SENSBOT: C6.1 U1.5 | length 541.6
  Top Layer w10: C6.1 2585,2030 2595,2020 2725,2020 2740,2005 2740,1917.23 2745.86,1911.37 2842.4,1911.37 2845.03,1908.74 U1.5
SENSGND: C6.2 U1.4 | length 463.6
  Top Layer w10: C6.2 2695,2080 2705,2070 2705,2045.86 2710.86,2040 2755,2040 2764.99,2030.01 2764.99,1934.86 2770.85,1929 2782.4,1929 2782.97,1928.43 U1.4
STAT1: D3.1 U1.12 | length 2429.8
  Top Layer w10: v1(2910,1740) 2940.94,1770.94 U1.12 ; v1(3265,244.99) 3267.68,242.31 3267.68,222.32 3275,215 3719.14,215 3725,220.86 D3.1
  Bottom Layer w10: v1(2910,1740) 2910,1135 3000,1045 3240,1045 3265,1020 v1(3265,244.99)
STAT2: D4.1 U1.13 | length 2678.2
  Top Layer w10: v1(2965,1685) 2985,1685 3012.5,1712.5 U1.13 ; v1(3325,188) 3327,188 3355,160 3975,160 3995,180 D4.1
  Bottom Layer w10: v1(2965,1685) 2963,1683 2963,1177 3040,1100 3290,1100 3325.86,1064.14 3325.86,1055.86 3325,1055 v1(3325,188)
SW1: C8.1 L1.1 Q1.3 Q4.4 U1.38 | length 6682.3
  Top Layer w10: 205,2680 225,2700 225,2915 245,2935 v1(845,2935) ; v1(935,2460) 970,2495 v1(2655,2495) ; C8.1 2715,2200 ; v1(2725,2250) 2725,2210 2715,2200 ; U1.38 3012.5,2192.5 3005,2200 2715,2200
  Top Layer w50: L1.1 205,2680 145,2620 145,1895 215,1825 Q4.4 500,1810 740.71,1810 770,1780.71 770,964.29 740.71,935 Q1.3
  Bottom Layer w10: v1(845,2935) 895,2935 935,2895 v1(935,2460) ; v1(2655,2495) 2685,2495 2725,2455 v1(2725,2250)
SW2: C2.2 L1.2 Q2.3 Q3.4 U1.32 | length 6300.7
  Top Layer w10: U1.32 3130.61,2135.61 3150,2155 3170,2155 ; v1(3170,2085) 3170,2155 ; C2.2 3780,2195 3760,2175 3760,2120 3735,2095 3380,2095 3320,2155 3170,2155
  Top Layer w15: v2(1455,2595) 1495,2635 v1(3070,2635)
  Top Layer w50: L1.2 1090,2680 1175,2595 v2(1455,2595) ; Q3.4 v2(1450,1825) ; Q2.3 1405,935 1445,975 v2(1445,1050)
  Bottom Layer w10: v1(3070,2635) 3070,2555 3110,2515 3110,2120 3143,2087 3168,2087 v1(3170,2085)
  Bottom Layer w50: v2(1445,1050) 1450,1055 v2(1450,1825) 1455,1830 v2(1455,2595)
TG1_in: Q1.1 U1.1 | length 3964
  Top Layer w10: v1(2735,2070) 2767,2102 2872.78,2102 2910.64,2064.14 2910.64,1994.36 2917.24,1987.76 2937.24,1987.76 2937.52,1987.48 U1.1
  Top Layer w20: Q1.1 385,805 420,770 1450,770 1595,915 v1@1875,915 ; v1@2080,1180 2518.92,1180 2528.92,1190 v1(2530,1190)
  Bottom Layer w10: v1(2530,1190) 2560,1220 2695,1220 2710,1235 2710,1540 2737,1567 2737,1977.67 2735,1979.67 v1(2735,2070)
  Bottom Layer w20: v1(1871.18,912.67) 1920,961.5 1920,1155 1942.67,1177.67 v1(2076.18,1177.67)
TG2_in: Q2.1 U1.31 | length 4609.2
  Top Layer w10: Q2.1 995,835 1010,820 1430,820 1575,965 1674.14,965 1685,975.86 v1(1685,1015) ; v1(1685,2580) v1(3195,2580) ; U1.31 3199.14,1987.48 3210,1998.34 v1(3210,2120)
  Bottom Layer w10: v1(1685,1015) v1(1685,2580) ; v1(3195,2580) 3195,2576.21 3210,2561.21 v1(3210,2120)
V_in: C12.2 C13.1 D5.1 F1.2 R1.1 U1.7 U1.9 U1.10 U1.36 | length 5591.7
  Top Layer w10: v1(2825,1740) 2890,1805 2908.03,1810 U1.10@2974.68,1810 ; v1(2825,1788) 2825,1790 2865,1830 U1.9 ; v1(2825,2270) 3010,2270 3051.87,2228.13 U1.36 ; v1(2828.78,1865.59) 2832.57,1865.59 2836.34,1869.37 U1.7
  Top Layer w25: R1.1 1554.92,694.92 1575,715 2820,715 2896.57,638.43 2896.57,516.57 C12.2
  Top Layer w50: F1.2 620.83,563.5 621.22,563.9 911.1,563.9 D5.1 1234.91,567.8 1264.2,538.51 ; C13.1@1264.2,479.85 1264.2,538.51 ; R1.1 1285.69,560 1264.2,538.51
  Bottom Layer w10: v1(2825,2270) 2827,2268 2827,1867.59 v1@2826.89,1867.48 ; v1(2828.78,1865.59) 2826.89,1863.7 2826.89,1789.89 v1(2825,1788) v1(2825,1740) 2825,480.43 2885.43,420 C12.2
V_out: C1.2 J1.1 Q2.4 R3.2 R5.1 | length 6890
  Top Layer w10: R3.2 v1(3680,2285)
  Top Layer w50: Q2.4 1540,1385 1610,1315 1610,1129.29 1639.29,1100 2025,1100 2060,1065 2060,824.29 2089.29,795 3495,795 3540,840 v2(3540,945) 3790,945 4175,560 v2(4220,560) 4843.11,560 J1.1 ; v2(3540,1350) 3540,1449.96 R5.1
  Bottom Layer w10: v2(3540,1350) 3470,1350 3440,1380 3440,1810 3460,1830 3549.14,1830 3555,1835.86 3555,2170 3575,2190 3674.14,2190 3680,2195.86 v1(3680,2285)
  Bottom Layer w50: v2(3540,945) v2(3540,1350) ; v2(4220,560) 4221.85,561.85 C1.2
VC: C7.1 R13.1 U1.28 | length 2090.6
  Top Layer w10: R13.1 3220,1470 3232.5,1482.5 v1(3232.5,1507.5) 3267.5,1507.5 3285,1490 3285,1405.86 3290.86,1400 3330,1400 3345,1385 3345,1315 3355,1305 3729.14,1305 3735,1310.86 3735,1494.14 3740.86,1500 C7.1 ; U1.28 3211.45,1928.43 3220.35,1937.32 3237.32,1937.32 v1(3240,1940)
  Bottom Layer w10: v1(3232.5,1507.5) 3232.5,1750.68 3252,1770.18 3252,1909.21 3242.68,1918.53 3242.68,1937.32 v1(3240,1940)
VFB: R10.2 R14.1 U1.17 | length 990
  Top Layer w10: R14.1 2567.45,1716.59 2575.86,1725 2606.69,1725 2612.55,1730.86 R10.2 2740,1790 2750,1780 2750,1625 2767,1608 3094.14,1608 3105,1618.86 3105,1650 3091.24,1663.76 U1.17
VFBMAX: R12.2 R16.1 U1.26 | length 2314.6
  Top Layer w10: R12.2@2157.45,1487.55 2157.45,1569.14 2163.31,1575 2335,1575 2360,1550 v1(2870,1550) ; v1(2870,1405) v1(3240,1405) ; U1.26 3168.57,1889.53 3279.53,1889.53 v1(3280,1890)
  Top Layer w15: R16.1 2075,1660 2055,1640 2055,1500 2067.45,1487.55 R12.2@2157.45,1487.55
  Bottom Layer w10: v1(2870,1405) v1(2870,1550) ; v1(3240,1405) 3242.68,1402.32 3263.39,1402.32 3263.72,1402 3272,1402 3280,1410 v1(3280,1890)
VFBMIN: R11.2 R15.1 U1.19 | length 2421.5
  Top Layer w10: v1(2040,1760) 2040,1795 2065,1820 ; v1(2080,1270) 2740,1270 v1(2765,1295) ; R11.2 2065,1820 ; R15.1 2060,1980 2050,1970 2050,1835 2065,1820 ; v1(2765,1515) 3085,1515 3160,1590 3160,1675 3130.61,1704.39 U1.19
  Bottom Layer w10: v1(2040,1760) 2040,1310 v1(2080,1270) ; v1(2765,1295) v1(2765,1515)